# Altium PCB MK2.PcbDoc (part 5 of 7)
Units mil, origin at the board's own origin, x right, y up, seen from the top; angles counter-clockwise.
Board outline 3950 x 3965 mil, 2 copper layers (Top Layer, Bottom Layer); 19 components, 37 nets, 113 pads, 8 vias.
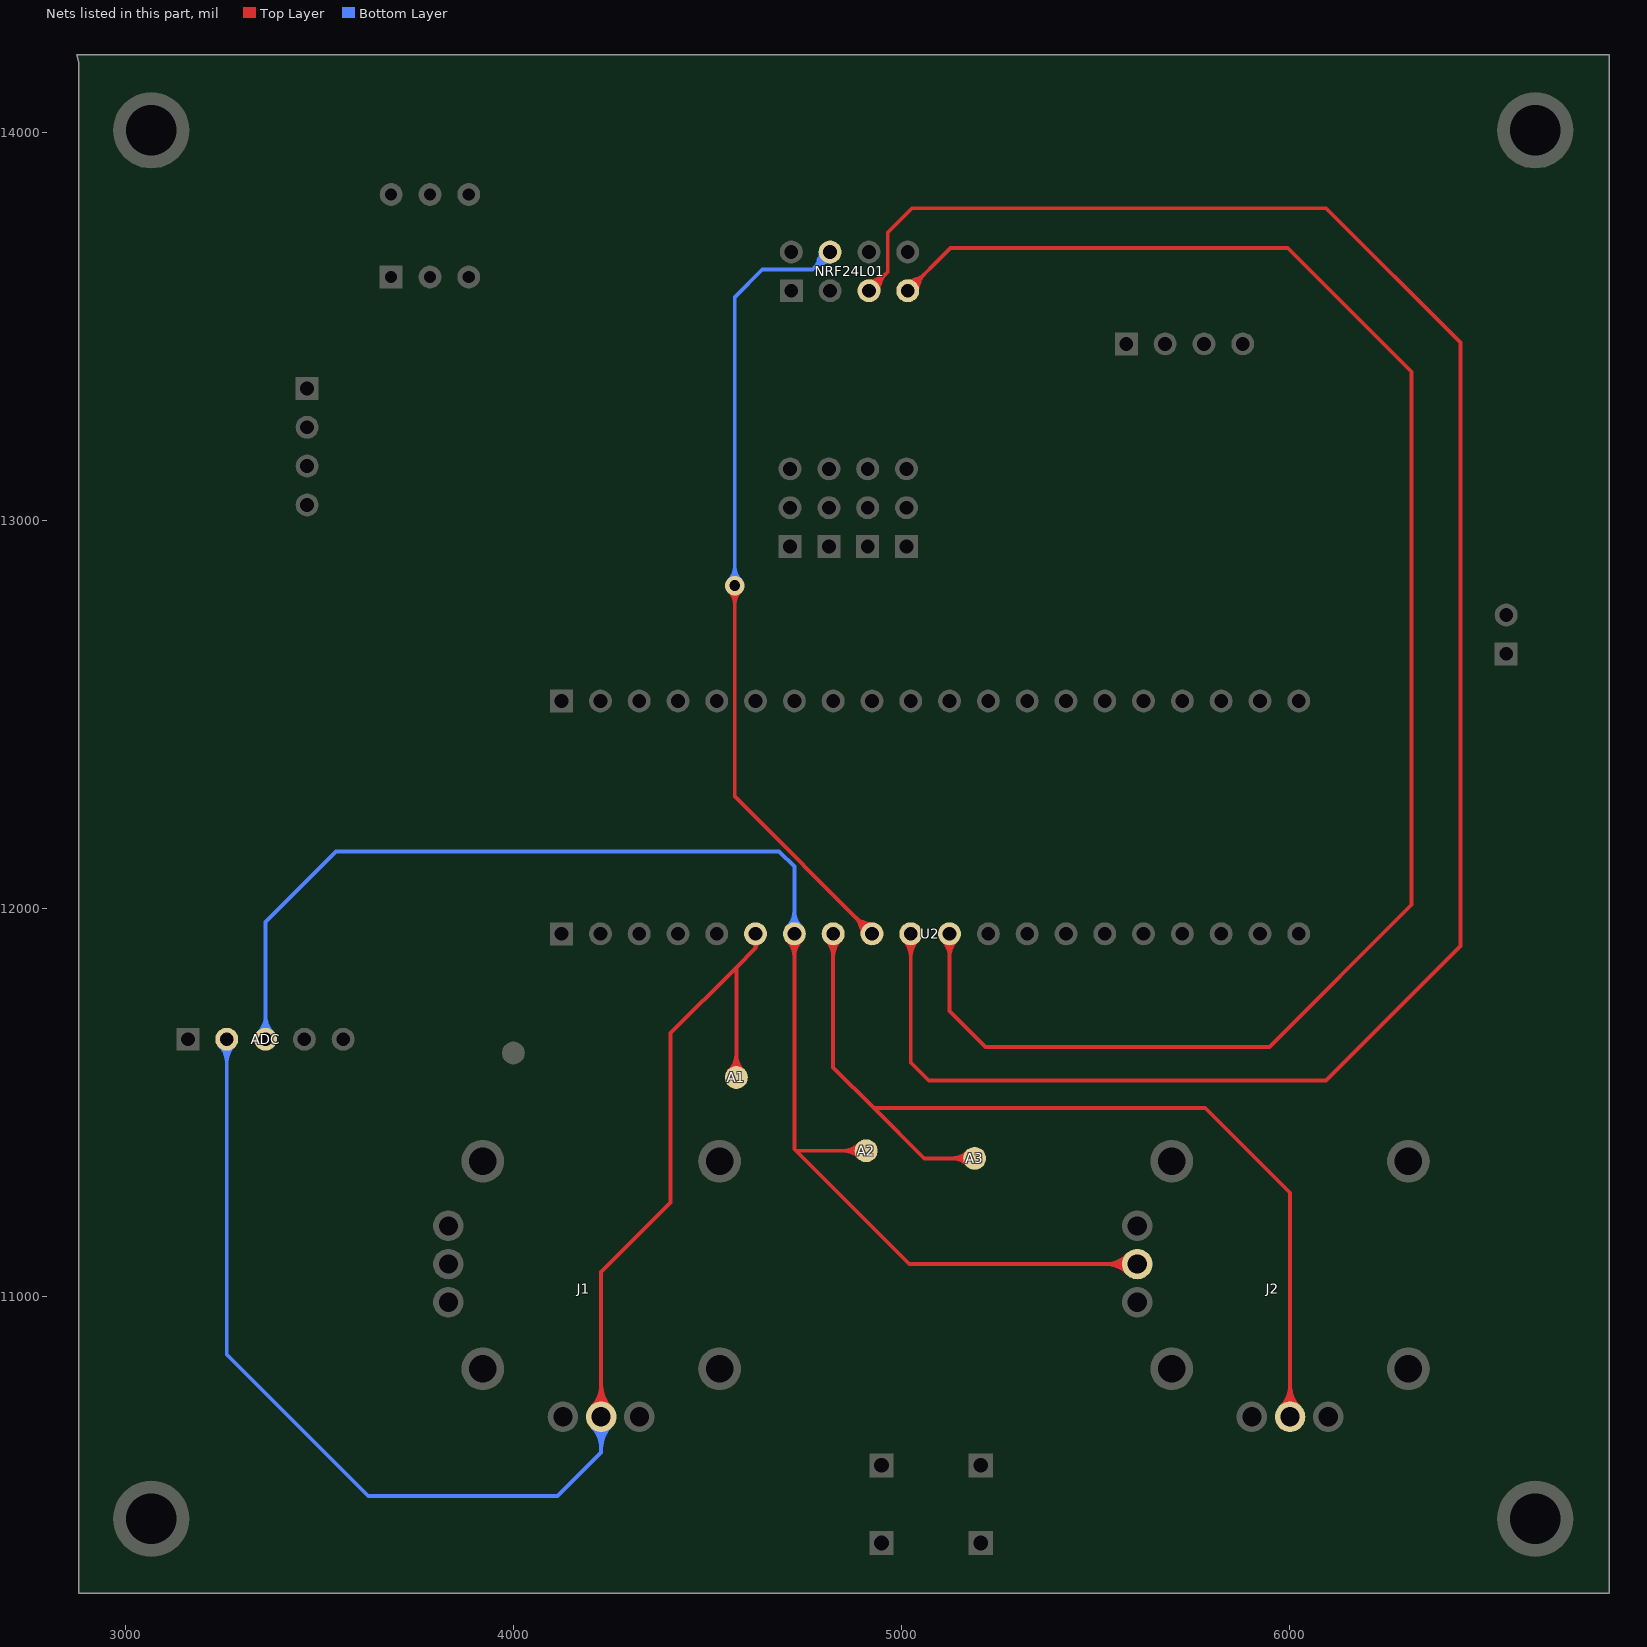
[diagram p5: the nets of this part, all layers, seen from the top]

## Via types
v1: diameter 50, hole 28, Top Layer to Bottom Layer, 8 vias

## Nets (pads, with @x,y where several pads share a name; then routed paths per layer and width w, separated by ;. In a path a pad name is that pad's centre, name@x,y a point inside that pad or via, vN(x,y) a via of type N, cw(c..) or ccw(c..) an arc to the next point about the centre after c; other vN are vias at no path point) (continued)
PA1: A1.1 ADC.2 J1.2 U2.6 | length 8430.2
  Top Layer w10: J1.2@4226.38,10689.65 4226.38,11062.36 4405.55,11241.54 4405.55,11678.54 4574.84,11847.83 ; A1.1@4574.84,11564.37 4574.84,11847.83 ; U2.6@4624.45,11934.45 4624.45,11897.44 ; J1.2@4202.07,10713.95 ccw(c4143.4,10772.62) 4226.38,10772.62 ; J1.2@4202.07,10713.95 ccw(c4143.4,10772.62) 4226.38,10772.62 ; J1.2@4202.07,10713.95 ccw(c4143.4,10772.62) 4226.38,10772.62 ; J1.2@4202.07,10713.95 ccw(c4143.4,10772.62) 4226.38,10772.62 ; J1.2@4202.07,10713.95 ccw(c4143.4,10772.62) 4226.38,10772.62 ; J1.2@4202.07,10713.95 ccw(c4143.4,10772.62) 4226.38,10772.62 ; J1.2@4209.15,10706.88 ccw(c4167.54,10748.48) 4226.38,10748.48 ; J1.2@4209.15,10706.88 ccw(c4167.54,10748.48) 4226.38,10748.48 ; J1.2@4209.15,10706.88 ccw(c4167.54,10748.48) 4226.38,10748.48 ; J1.2@4209.15,10706.88 ccw(c4167.54,10748.48) 4226.38,10748.48 ; J1.2@4209.15,10706.88 ccw(c4167.54,10748.48) 4226.38,10748.48 ; J1.2@4209.15,10706.88 ccw(c4167.54,10748.48) 4226.38,10748.48 ; 4226.38,10748.48 ccw(c4285.21,10748.48) J1.2@4243.61,10706.88 ; 4226.38,10748.48 ccw(c4285.21,10748.48) J1.2@4243.61,10706.88 ; 4226.38,10748.48 ccw(c4285.21,10748.48) J1.2@4243.61,10706.88 ; 4226.38,10748.48 ccw(c4285.21,10748.48) J1.2@4243.61,10706.88 ; 4226.38,10748.48 ccw(c4285.21,10748.48) J1.2@4243.61,10706.88 ; 4226.38,10748.48 ccw(c4285.21,10748.48) J1.2@4243.61,10706.88 ; 4226.38,10772.62 ccw(c4309.35,10772.62) J1.2@4250.68,10713.95 ; 4226.38,10772.62 ccw(c4309.35,10772.62) J1.2@4250.68,10713.95 ; 4226.38,10772.62 ccw(c4309.35,10772.62) J1.2@4250.68,10713.95 ; 4226.38,10772.62 ccw(c4309.35,10772.62) J1.2@4250.68,10713.95 ; 4226.38,10772.62 ccw(c4309.35,10772.62) J1.2@4250.68,10713.95 ; 4226.38,10772.62 ccw(c4309.35,10772.62) J1.2@4250.68,10713.95 ; A1.1@4557.5,11581.71 ccw(c4515.63,11623.58) 4574.84,11623.58 ; A1.1@4557.5,11581.71 ccw(c4515.63,11623.58) 4574.84,11623.58 ; A1.1@4557.5,11581.71 ccw(c4515.63,11623.58) 4574.84,11623.58 ; A1.1@4557.5,11581.71 ccw(c4515.63,11623.58) 4574.84,11623.58 ; A1.1@4557.5,11581.71 ccw(c4515.63,11623.58) 4574.84,11623.58 ; A1.1@4557.5,11581.71 ccw(c4515.63,11623.58) 4574.84,11623.58 ; A1.1@4564.57,11574.64 ccw(c4539.77,11599.44) 4574.84,11599.44 ; A1.1@4564.57,11574.64 ccw(c4539.77,11599.44) 4574.84,11599.44 ; A1.1@4564.57,11574.64 ccw(c4539.77,11599.44) 4574.84,11599.44 ; A1.1@4564.57,11574.64 ccw(c4539.77,11599.44) 4574.84,11599.44 ; A1.1@4564.57,11574.64 ccw(c4539.77,11599.44) 4574.84,11599.44 ; A1.1@4564.57,11574.64 ccw(c4539.77,11599.44) 4574.84,11599.44 ; 4574.84,11599.44 ccw(c4609.91,11599.44) A1.1@4585.11,11574.64 ; 4574.84,11599.44 ccw(c4609.91,11599.44) A1.1@4585.11,11574.64 ; 4574.84,11599.44 ccw(c4609.91,11599.44) A1.1@4585.11,11574.64 ; 4574.84,11599.44 ccw(c4609.91,11599.44) A1.1@4585.11,11574.64 ; 4574.84,11599.44 ccw(c4609.91,11599.44) A1.1@4585.11,11574.64 ; 4574.84,11599.44 ccw(c4609.91,11599.44) A1.1@4585.11,11574.64 ; 4574.84,11623.58 ccw(c4634.06,11623.58) A1.1@4592.19,11581.71 ; 4574.84,11623.58 ccw(c4634.06,11623.58) A1.1@4592.19,11581.71 ; 4574.84,11623.58 ccw(c4634.06,11623.58) A1.1@4592.19,11581.71 ; 4574.84,11623.58 ccw(c4634.06,11623.58) A1.1@4592.19,11581.71 ; 4574.84,11623.58 ccw(c4634.06,11623.58) A1.1@4592.19,11581.71 ; 4574.84,11623.58 ccw(c4634.06,11623.58) A1.1@4592.19,11581.71 ; 4574.84,11847.83 4624.45,11897.44 ; U2.6@4614.89,11911.86 cw(c4608.8,11897.44) 4624.45,11897.44 ; U2.6@4614.89,11911.86 cw(c4608.8,11897.44) 4624.45,11897.44 ; U2.6@4614.89,11911.86 cw(c4608.8,11897.44) 4624.45,11897.44 ; U2.6@4614.89,11911.86 cw(c4608.8,11897.44) 4624.45,11897.44 ; U2.6@4614.89,11911.86 cw(c4608.8,11897.44) 4624.45,11897.44 ; U2.6@4614.89,11911.86 cw(c4608.8,11897.44) 4624.45,11897.44 ; 4624.45,11897.44 cw(c4640.1,11897.44) U2.6@4634,11911.86 ; 4624.45,11897.44 cw(c4640.1,11897.44) U2.6@4634,11911.86 ; 4624.45,11897.44 cw(c4640.1,11897.44) U2.6@4634,11911.86 ; 4624.45,11897.44 cw(c4640.1,11897.44) U2.6@4634,11911.86 ; 4624.45,11897.44 cw(c4640.1,11897.44) U2.6@4634,11911.86 ; 4624.45,11897.44 cw(c4640.1,11897.44) U2.6@4634,11911.86
  Bottom Layer w10: ADC.2@3261.46,11662.8 3261.46,10850.2 3626.02,10485.63 4114.21,10485.63 4226.38,10597.8 J1.2@4226.38,10689.65 ; ADC.2@3244.11,11645.45 cw(c3202.24,11603.58) 3261.46,11603.58 ; ADC.2@3244.11,11645.45 cw(c3202.24,11603.58) 3261.46,11603.58 ; ADC.2@3244.11,11645.45 cw(c3202.24,11603.58) 3261.46,11603.58 ; ADC.2@3244.11,11645.45 cw(c3202.24,11603.58) 3261.46,11603.58 ; ADC.2@3244.11,11645.45 cw(c3202.24,11603.58) 3261.46,11603.58 ; ADC.2@3244.11,11645.45 cw(c3202.24,11603.58) 3261.46,11603.58 ; ADC.2@3251.18,11652.52 cw(c3226.38,11627.72) 3261.46,11627.72 ; ADC.2@3251.18,11652.52 cw(c3226.38,11627.72) 3261.46,11627.72 ; ADC.2@3251.18,11652.52 cw(c3226.38,11627.72) 3261.46,11627.72 ; ADC.2@3251.18,11652.52 cw(c3226.38,11627.72) 3261.46,11627.72 ; ADC.2@3251.18,11652.52 cw(c3226.38,11627.72) 3261.46,11627.72 ; ADC.2@3251.18,11652.52 cw(c3226.38,11627.72) 3261.46,11627.72 ; 3261.46,11603.58 cw(c3320.67,11603.58) ADC.2@3278.8,11645.45 ; 3261.46,11603.58 cw(c3320.67,11603.58) ADC.2@3278.8,11645.45 ; 3261.46,11603.58 cw(c3320.67,11603.58) ADC.2@3278.8,11645.45 ; 3261.46,11603.58 cw(c3320.67,11603.58) ADC.2@3278.8,11645.45 ; 3261.46,11603.58 cw(c3320.67,11603.58) ADC.2@3278.8,11645.45 ; 3261.46,11603.58 cw(c3320.67,11603.58) ADC.2@3278.8,11645.45 ; 3261.46,11627.72 cw(c3296.53,11627.72) ADC.2@3271.73,11652.52 ; 3261.46,11627.72 cw(c3296.53,11627.72) ADC.2@3271.73,11652.52 ; 3261.46,11627.72 cw(c3296.53,11627.72) ADC.2@3271.73,11652.52 ; 3261.46,11627.72 cw(c3296.53,11627.72) ADC.2@3271.73,11652.52 ; 3261.46,11627.72 cw(c3296.53,11627.72) ADC.2@3271.73,11652.52 ; 3261.46,11627.72 cw(c3296.53,11627.72) ADC.2@3271.73,11652.52 ; J1.2@4202.07,10665.34 cw(c4143.4,10606.67) 4226.38,10606.67 ; J1.2@4202.07,10665.34 cw(c4143.4,10606.67) 4226.38,10606.67 ; J1.2@4202.07,10665.34 cw(c4143.4,10606.67) 4226.38,10606.67 ; J1.2@4202.07,10665.34 cw(c4143.4,10606.67) 4226.38,10606.67 ; J1.2@4202.07,10665.34 cw(c4143.4,10606.67) 4226.38,10606.67 ; J1.2@4202.07,10665.34 cw(c4143.4,10606.67) 4226.38,10606.67 ; J1.2@4209.15,10672.41 cw(c4167.54,10630.81) 4226.38,10630.81 ; J1.2@4209.15,10672.41 cw(c4167.54,10630.81) 4226.38,10630.81 ; J1.2@4209.15,10672.41 cw(c4167.54,10630.81) 4226.38,10630.81 ; J1.2@4209.15,10672.41 cw(c4167.54,10630.81) 4226.38,10630.81 ; J1.2@4209.15,10672.41 cw(c4167.54,10630.81) 4226.38,10630.81 ; J1.2@4209.15,10672.41 cw(c4167.54,10630.81) 4226.38,10630.81 ; 4226.38,10606.67 cw(c4309.35,10606.67) J1.2@4250.68,10665.34 ; 4226.38,10606.67 cw(c4309.35,10606.67) J1.2@4250.68,10665.34 ; 4226.38,10606.67 cw(c4309.35,10606.67) J1.2@4250.68,10665.34 ; 4226.38,10606.67 cw(c4309.35,10606.67) J1.2@4250.68,10665.34 ; 4226.38,10606.67 cw(c4309.35,10606.67) J1.2@4250.68,10665.34 ; 4226.38,10606.67 cw(c4309.35,10606.67) J1.2@4250.68,10665.34 ; 4226.38,10630.81 cw(c4285.21,10630.81) J1.2@4243.61,10672.41 ; 4226.38,10630.81 cw(c4285.21,10630.81) J1.2@4243.61,10672.41 ; 4226.38,10630.81 cw(c4285.21,10630.81) J1.2@4243.61,10672.41 ; 4226.38,10630.81 cw(c4285.21,10630.81) J1.2@4243.61,10672.41 ; 4226.38,10630.81 cw(c4285.21,10630.81) J1.2@4243.61,10672.41 ; 4226.38,10630.81 cw(c4285.21,10630.81) J1.2@4243.61,10672.41
PA2: A2.1 ADC.3 J2.5 U2.7 | length 8564
  Top Layer w10: U2.7@4724.45,11934.45 4724.45,11379.33 4728.39,11375.39 ; A2.1@4909.49,11375.39 4728.39,11375.39 ; J2.5@5608.27,11083.35 5020.43,11083.35 4728.39,11375.39 ; U2.7@4707.11,11917.11 cw(c4665.23,11875.23) 4724.45,11875.23 ; U2.7@4707.11,11917.11 cw(c4665.23,11875.23) 4724.45,11875.23 ; U2.7@4707.11,11917.11 cw(c4665.23,11875.23) 4724.45,11875.23 ; U2.7@4707.11,11917.11 cw(c4665.23,11875.23) 4724.45,11875.23 ; U2.7@4707.11,11917.11 cw(c4665.23,11875.23) 4724.45,11875.23 ; U2.7@4707.11,11917.11 cw(c4665.23,11875.23) 4724.45,11875.23 ; U2.7@4714.18,11924.18 cw(c4689.38,11899.38) 4724.45,11899.38 ; U2.7@4714.18,11924.18 cw(c4689.38,11899.38) 4724.45,11899.38 ; U2.7@4714.18,11924.18 cw(c4689.38,11899.38) 4724.45,11899.38 ; U2.7@4714.18,11924.18 cw(c4689.38,11899.38) 4724.45,11899.38 ; U2.7@4714.18,11924.18 cw(c4689.38,11899.38) 4724.45,11899.38 ; U2.7@4714.18,11924.18 cw(c4689.38,11899.38) 4724.45,11899.38 ; 4724.45,11875.23 cw(c4783.66,11875.23) U2.7@4741.79,11917.11 ; 4724.45,11875.23 cw(c4783.66,11875.23) U2.7@4741.79,11917.11 ; 4724.45,11875.23 cw(c4783.66,11875.23) U2.7@4741.79,11917.11 ; 4724.45,11875.23 cw(c4783.66,11875.23) U2.7@4741.79,11917.11 ; 4724.45,11875.23 cw(c4783.66,11875.23) U2.7@4741.79,11917.11 ; 4724.45,11875.23 cw(c4783.66,11875.23) U2.7@4741.79,11917.11 ; 4724.45,11899.38 cw(c4759.52,11899.38) U2.7@4734.72,11924.18 ; 4724.45,11899.38 cw(c4759.52,11899.38) U2.7@4734.72,11924.18 ; 4724.45,11899.38 cw(c4759.52,11899.38) U2.7@4734.72,11924.18 ; 4724.45,11899.38 cw(c4759.52,11899.38) U2.7@4734.72,11924.18 ; 4724.45,11899.38 cw(c4759.52,11899.38) U2.7@4734.72,11924.18 ; 4724.45,11899.38 cw(c4759.52,11899.38) U2.7@4734.72,11924.18 ; 4850.27,11375.39 cw(c4850.27,11316.18) A2.1@4892.14,11358.05 ; 4850.27,11375.39 ccw(c4850.27,11434.61) A2.1@4892.14,11392.74 ; 4850.27,11375.39 ccw(c4850.27,11434.61) A2.1@4892.14,11392.74 ; 4850.27,11375.39 cw(c4850.27,11316.18) A2.1@4892.14,11358.05 ; 4850.27,11375.39 ccw(c4850.27,11434.61) A2.1@4892.14,11392.74 ; 4850.27,11375.39 cw(c4850.27,11316.18) A2.1@4892.14,11358.05 ; 4850.27,11375.39 ccw(c4850.27,11434.61) A2.1@4892.14,11392.74 ; 4850.27,11375.39 cw(c4850.27,11316.18) A2.1@4892.14,11358.05 ; 4850.27,11375.39 ccw(c4850.27,11434.61) A2.1@4892.14,11392.74 ; 4850.27,11375.39 cw(c4850.27,11316.18) A2.1@4892.14,11358.05 ; 4850.27,11375.39 ccw(c4850.27,11434.61) A2.1@4892.14,11392.74 ; 4850.27,11375.39 cw(c4850.27,11316.18) A2.1@4892.14,11358.05 ; 4874.42,11375.39 cw(c4874.42,11340.32) A2.1@4899.22,11365.12 ; 4874.42,11375.39 ccw(c4874.42,11410.47) A2.1@4899.22,11385.67 ; 4874.42,11375.39 ccw(c4874.42,11410.47) A2.1@4899.22,11385.67 ; 4874.42,11375.39 cw(c4874.42,11340.32) A2.1@4899.22,11365.12 ; 4874.42,11375.39 ccw(c4874.42,11410.47) A2.1@4899.22,11385.67 ; 4874.42,11375.39 cw(c4874.42,11340.32) A2.1@4899.22,11365.12 ; 4874.42,11375.39 ccw(c4874.42,11410.47) A2.1@4899.22,11385.67 ; 4874.42,11375.39 cw(c4874.42,11340.32) A2.1@4899.22,11365.12 ; 4874.42,11375.39 ccw(c4874.42,11410.47) A2.1@4899.22,11385.67 ; 4874.42,11375.39 cw(c4874.42,11340.32) A2.1@4899.22,11365.12 ; 4874.42,11375.39 ccw(c4874.42,11410.47) A2.1@4899.22,11385.67 ; 4874.42,11375.39 cw(c4874.42,11340.32) A2.1@4899.22,11365.12 ; 5525.29,11083.35 cw(c5525.29,11000.37) J2.5@5583.96,11059.04 ; 5525.29,11083.35 ccw(c5525.29,11166.32) J2.5@5583.96,11107.65 ; 5525.29,11083.35 ccw(c5525.29,11166.32) J2.5@5583.96,11107.65 ; 5525.29,11083.35 cw(c5525.29,11000.37) J2.5@5583.96,11059.04 ; 5525.29,11083.35 ccw(c5525.29,11166.32) J2.5@5583.96,11107.65 ; 5525.29,11083.35 cw(c5525.29,11000.37) J2.5@5583.96,11059.04 ; 5525.29,11083.35 ccw(c5525.29,11166.32) J2.5@5583.96,11107.65 ; 5525.29,11083.35 cw(c5525.29,11000.37) J2.5@5583.96,11059.04 ; 5525.29,11083.35 ccw(c5525.29,11166.32) J2.5@5583.96,11107.65 ; 5525.29,11083.35 cw(c5525.29,11000.37) J2.5@5583.96,11059.04 ; 5525.29,11083.35 ccw(c5525.29,11166.32) J2.5@5583.96,11107.65 ; 5525.29,11083.35 cw(c5525.29,11000.37) J2.5@5583.96,11059.04 ; 5549.43,11083.35 cw(c5549.43,11024.51) J2.5@5591.04,11066.11 ; 5549.43,11083.35 ccw(c5549.43,11142.18) J2.5@5591.04,11100.58 ; 5549.43,11083.35 ccw(c5549.43,11142.18) J2.5@5591.04,11100.58 ; 5549.43,11083.35 cw(c5549.43,11024.51) J2.5@5591.04,11066.11 ; 5549.43,11083.35 ccw(c5549.43,11142.18) J2.5@5591.04,11100.58 ; 5549.43,11083.35 cw(c5549.43,11024.51) J2.5@5591.04,11066.11 ; 5549.43,11083.35 ccw(c5549.43,11142.18) J2.5@5591.04,11100.58 ; 5549.43,11083.35 cw(c5549.43,11024.51) J2.5@5591.04,11066.11 ; 5549.43,11083.35 ccw(c5549.43,11142.18) J2.5@5591.04,11100.58 ; 5549.43,11083.35 cw(c5549.43,11024.51) J2.5@5591.04,11066.11 ; 5549.43,11083.35 ccw(c5549.43,11142.18) J2.5@5591.04,11100.58 ; 5549.43,11083.35 cw(c5549.43,11024.51) J2.5@5591.04,11066.11
  Bottom Layer w10: ADC.3@3361.46,11662.8 3361.46,11965.16 3543.35,12147.05 4685.08,12147.05 4724.45,12107.68 U2.7@4724.45,11934.45 ; ADC.3@3344.11,11680.14 ccw(c3302.24,11722.01) 3361.46,11722.01 ; ADC.3@3344.11,11680.14 ccw(c3302.24,11722.01) 3361.46,11722.01 ; ADC.3@3344.11,11680.14 ccw(c3302.24,11722.01) 3361.46,11722.01 ; ADC.3@3344.11,11680.14 ccw(c3302.24,11722.01) 3361.46,11722.01 ; ADC.3@3344.11,11680.14 ccw(c3302.24,11722.01) 3361.46,11722.01 ; ADC.3@3344.11,11680.14 ccw(c3302.24,11722.01) 3361.46,11722.01 ; ADC.3@3351.18,11673.07 ccw(c3326.38,11697.87) 3361.46,11697.87 ; ADC.3@3351.18,11673.07 ccw(c3326.38,11697.87) 3361.46,11697.87 ; ADC.3@3351.18,11673.07 ccw(c3326.38,11697.87) 3361.46,11697.87 ; ADC.3@3351.18,11673.07 ccw(c3326.38,11697.87) 3361.46,11697.87 ; ADC.3@3351.18,11673.07 ccw(c3326.38,11697.87) 3361.46,11697.87 ; ADC.3@3351.18,11673.07 ccw(c3326.38,11697.87) 3361.46,11697.87 ; 3361.46,11697.87 ccw(c3396.53,11697.87) ADC.3@3371.73,11673.07 ; 3361.46,11697.87 ccw(c3396.53,11697.87) ADC.3@3371.73,11673.07 ; 3361.46,11697.87 ccw(c3396.53,11697.87) ADC.3@3371.73,11673.07 ; 3361.46,11697.87 ccw(c3396.53,11697.87) ADC.3@3371.73,11673.07 ; 3361.46,11697.87 ccw(c3396.53,11697.87) ADC.3@3371.73,11673.07 ; 3361.46,11697.87 ccw(c3396.53,11697.87) ADC.3@3371.73,11673.07 ; 3361.46,11722.01 ccw(c3420.67,11722.01) ADC.3@3378.8,11680.14 ; 3361.46,11722.01 ccw(c3420.67,11722.01) ADC.3@3378.8,11680.14 ; 3361.46,11722.01 ccw(c3420.67,11722.01) ADC.3@3378.8,11680.14 ; 3361.46,11722.01 ccw(c3420.67,11722.01) ADC.3@3378.8,11680.14 ; 3361.46,11722.01 ccw(c3420.67,11722.01) ADC.3@3378.8,11680.14 ; 3361.46,11722.01 ccw(c3420.67,11722.01) ADC.3@3378.8,11680.14 ; U2.7@4707.11,11951.79 ccw(c4665.23,11993.66) 4724.45,11993.66 ; U2.7@4707.11,11951.79 ccw(c4665.23,11993.66) 4724.45,11993.66 ; U2.7@4707.11,11951.79 ccw(c4665.23,11993.66) 4724.45,11993.66 ; U2.7@4707.11,11951.79 ccw(c4665.23,11993.66) 4724.45,11993.66 ; U2.7@4707.11,11951.79 ccw(c4665.23,11993.66) 4724.45,11993.66 ; U2.7@4707.11,11951.79 ccw(c4665.23,11993.66) 4724.45,11993.66 ; U2.7@4714.18,11944.72 ccw(c4689.38,11969.52) 4724.45,11969.52 ; U2.7@4714.18,11944.72 ccw(c4689.38,11969.52) 4724.45,11969.52 ; U2.7@4714.18,11944.72 ccw(c4689.38,11969.52) 4724.45,11969.52 ; U2.7@4714.18,11944.72 ccw(c4689.38,11969.52) 4724.45,11969.52 ; U2.7@4714.18,11944.72 ccw(c4689.38,11969.52) 4724.45,11969.52 ; U2.7@4714.18,11944.72 ccw(c4689.38,11969.52) 4724.45,11969.52 ; 4724.45,11969.52 ccw(c4759.52,11969.52) U2.7@4734.72,11944.72 ; 4724.45,11969.52 ccw(c4759.52,11969.52) U2.7@4734.72,11944.72 ; 4724.45,11969.52 ccw(c4759.52,11969.52) U2.7@4734.72,11944.72 ; 4724.45,11969.52 ccw(c4759.52,11969.52) U2.7@4734.72,11944.72 ; 4724.45,11969.52 ccw(c4759.52,11969.52) U2.7@4734.72,11944.72 ; 4724.45,11969.52 ccw(c4759.52,11969.52) U2.7@4734.72,11944.72 ; 4724.45,11993.66 ccw(c4783.66,11993.66) U2.7@4741.79,11951.79 ; 4724.45,11993.66 ccw(c4783.66,11993.66) U2.7@4741.79,11951.79 ; 4724.45,11993.66 ccw(c4783.66,11993.66) U2.7@4741.79,11951.79 ; 4724.45,11993.66 ccw(c4783.66,11993.66) U2.7@4741.79,11951.79 ; 4724.45,11993.66 ccw(c4783.66,11993.66) U2.7@4741.79,11951.79 ; 4724.45,11993.66 ccw(c4783.66,11993.66) U2.7@4741.79,11951.79
PA3: A3.1 J2.2 U2.8 | length 5660.5
  Top Layer w10: U2.8@4824.45,11934.45 4824.45,11590.35 4929.17,11485.63 ; A3.1@5189.02,11355.71 5059.09,11355.71 4929.17,11485.63 ; J2.2@6001.97,10689.65 6001.97,11267.17 5783.5,11485.63 4929.17,11485.63 ; U2.8@4807.11,11917.11 cw(c4765.23,11875.23) 4824.45,11875.23 ; U2.8@4807.11,11917.11 cw(c4765.23,11875.23) 4824.45,11875.23 ; U2.8@4807.11,11917.11 cw(c4765.23,11875.23) 4824.45,11875.23 ; U2.8@4807.11,11917.11 cw(c4765.23,11875.23) 4824.45,11875.23 ; U2.8@4807.11,11917.11 cw(c4765.23,11875.23) 4824.45,11875.23 ; U2.8@4807.11,11917.11 cw(c4765.23,11875.23) 4824.45,11875.23 ; U2.8@4814.18,11924.18 cw(c4789.38,11899.38) 4824.45,11899.38 ; U2.8@4814.18,11924.18 cw(c4789.38,11899.38) 4824.45,11899.38 ; U2.8@4814.18,11924.18 cw(c4789.38,11899.38) 4824.45,11899.38 ; U2.8@4814.18,11924.18 cw(c4789.38,11899.38) 4824.45,11899.38 ; U2.8@4814.18,11924.18 cw(c4789.38,11899.38) 4824.45,11899.38 ; U2.8@4814.18,11924.18 cw(c4789.38,11899.38) 4824.45,11899.38 ; 4824.45,11875.23 cw(c4883.66,11875.23) U2.8@4841.79,11917.11 ; 4824.45,11875.23 cw(c4883.66,11875.23) U2.8@4841.79,11917.11 ; 4824.45,11875.23 cw(c4883.66,11875.23) U2.8@4841.79,11917.11 ; 4824.45,11875.23 cw(c4883.66,11875.23) U2.8@4841.79,11917.11 ; 4824.45,11875.23 cw(c4883.66,11875.23) U2.8@4841.79,11917.11 ; 4824.45,11875.23 cw(c4883.66,11875.23) U2.8@4841.79,11917.11 ; 4824.45,11899.38 cw(c4859.52,11899.38) U2.8@4834.72,11924.18 ; 4824.45,11899.38 cw(c4859.52,11899.38) U2.8@4834.72,11924.18 ; 4824.45,11899.38 cw(c4859.52,11899.38) U2.8@4834.72,11924.18 ; 4824.45,11899.38 cw(c4859.52,11899.38) U2.8@4834.72,11924.18 ; 4824.45,11899.38 cw(c4859.52,11899.38) U2.8@4834.72,11924.18 ; 4824.45,11899.38 cw(c4859.52,11899.38) U2.8@4834.72,11924.18 ; 5129.8,11355.71 cw(c5129.8,11296.49) A3.1@5171.67,11338.37 ; 5129.8,11355.71 ccw(c5129.8,11414.92) A3.1@5171.67,11373.05 ; 5129.8,11355.71 ccw(c5129.8,11414.92) A3.1@5171.67,11373.05 ; 5129.8,11355.71 cw(c5129.8,11296.49) A3.1@5171.67,11338.37 ; 5129.8,11355.71 ccw(c5129.8,11414.92) A3.1@5171.67,11373.05 ; 5129.8,11355.71 cw(c5129.8,11296.49) A3.1@5171.67,11338.37 ; 5129.8,11355.71 ccw(c5129.8,11414.92) A3.1@5171.67,11373.05 ; 5129.8,11355.71 cw(c5129.8,11296.49) A3.1@5171.67,11338.37 ; 5129.8,11355.71 ccw(c5129.8,11414.92) A3.1@5171.67,11373.05 ; 5129.8,11355.71 cw(c5129.8,11296.49) A3.1@5171.67,11338.37 ; 5129.8,11355.71 ccw(c5129.8,11414.92) A3.1@5171.67,11373.05 ; 5129.8,11355.71 cw(c5129.8,11296.49) A3.1@5171.67,11338.37 ; 5153.94,11355.71 cw(c5153.94,11320.64) A3.1@5178.74,11345.44 ; 5153.94,11355.71 ccw(c5153.94,11390.78) A3.1@5178.74,11365.98 ; 5153.94,11355.71 ccw(c5153.94,11390.78) A3.1@5178.74,11365.98 ; 5153.94,11355.71 cw(c5153.94,11320.64) A3.1@5178.74,11345.44 ; 5153.94,11355.71 ccw(c5153.94,11390.78) A3.1@5178.74,11365.98 ; 5153.94,11355.71 cw(c5153.94,11320.64) A3.1@5178.74,11345.44 ; 5153.94,11355.71 ccw(c5153.94,11390.78) A3.1@5178.74,11365.98 ; 5153.94,11355.71 cw(c5153.94,11320.64) A3.1@5178.74,11345.44 ; 5153.94,11355.71 ccw(c5153.94,11390.78) A3.1@5178.74,11365.98 ; 5153.94,11355.71 cw(c5153.94,11320.64) A3.1@5178.74,11345.44 ; 5153.94,11355.71 ccw(c5153.94,11390.78) A3.1@5178.74,11365.98 ; 5153.94,11355.71 cw(c5153.94,11320.64) A3.1@5178.74,11345.44 ; J2.2@5977.67,10713.95 ccw(c5918.99,10772.62) 6001.97,10772.62 ; J2.2@5977.67,10713.95 ccw(c5918.99,10772.62) 6001.97,10772.62 ; J2.2@5977.67,10713.95 ccw(c5918.99,10772.62) 6001.97,10772.62 ; J2.2@5977.67,10713.95 ccw(c5918.99,10772.62) 6001.97,10772.62 ; J2.2@5977.67,10713.95 ccw(c5918.99,10772.62) 6001.97,10772.62 ; J2.2@5977.67,10713.95 ccw(c5918.99,10772.62) 6001.97,10772.62 ; J2.2@5984.74,10706.88 ccw(c5943.13,10748.48) 6001.97,10748.48 ; J2.2@5984.74,10706.88 ccw(c5943.13,10748.48) 6001.97,10748.48 ; J2.2@5984.74,10706.88 ccw(c5943.13,10748.48) 6001.97,10748.48 ; J2.2@5984.74,10706.88 ccw(c5943.13,10748.48) 6001.97,10748.48 ; J2.2@5984.74,10706.88 ccw(c5943.13,10748.48) 6001.97,10748.48 ; J2.2@5984.74,10706.88 ccw(c5943.13,10748.48) 6001.97,10748.48 ; 6001.97,10748.48 ccw(c6060.8,10748.48) J2.2@6019.2,10706.88 ; 6001.97,10748.48 ccw(c6060.8,10748.48) J2.2@6019.2,10706.88 ; 6001.97,10748.48 ccw(c6060.8,10748.48) J2.2@6019.2,10706.88 ; 6001.97,10748.48 ccw(c6060.8,10748.48) J2.2@6019.2,10706.88 ; 6001.97,10748.48 ccw(c6060.8,10748.48) J2.2@6019.2,10706.88 ; 6001.97,10748.48 ccw(c6060.8,10748.48) J2.2@6019.2,10706.88 ; 6001.97,10772.62 ccw(c6084.95,10772.62) J2.2@6026.27,10713.95 ; 6001.97,10772.62 ccw(c6084.95,10772.62) J2.2@6026.27,10713.95 ; 6001.97,10772.62 ccw(c6084.95,10772.62) J2.2@6026.27,10713.95 ; 6001.97,10772.62 ccw(c6084.95,10772.62) J2.2@6026.27,10713.95 ; 6001.97,10772.62 ccw(c6084.95,10772.62) J2.2@6026.27,10713.95 ; 6001.97,10772.62 ccw(c6084.95,10772.62) J2.2@6026.27,10713.95
PA4: NRF24L01.4 U2.9 | length 7322.3
  Top Layer w10: v1(4570.91,12832.09) 4570.91,12287.99 U2.9@4924.45,11934.45 ; v1@4556.76,12817.94 cw(c4522.62,12783.8) 4570.91,12783.8 ; v1@4556.76,12817.94 cw(c4522.62,12783.8) 4570.91,12783.8 ; v1@4556.76,12817.94 cw(c4522.62,12783.8) 4570.91,12783.8 ; v1@4556.76,12817.94 cw(c4522.62,12783.8) 4570.91,12783.8 ; v1@4556.76,12817.94 cw(c4522.62,12783.8) 4570.91,12783.8 ; v1@4556.76,12817.94 cw(c4522.62,12783.8) 4570.91,12783.8 ; 4570.91,12783.8 cw(c4619.19,12783.8) v1@4585.05,12817.94 ; 4570.91,12783.8 cw(c4619.19,12783.8) v1@4585.05,12817.94 ; 4570.91,12783.8 cw(c4619.19,12783.8) v1@4585.05,12817.94 ; 4570.91,12783.8 cw(c4619.19,12783.8) v1@4585.05,12817.94 ; 4570.91,12783.8 cw(c4619.19,12783.8) v1@4585.05,12817.94 ; 4570.91,12783.8 cw(c4619.19,12783.8) v1@4585.05,12817.94 ; 4882.58,11976.32 cw(c4840.71,11934.45) U2.9@4899.92,11934.45 ; 4882.58,11976.32 ccw(c4924.45,12018.19) U2.9@4924.45,11958.98 ; 4882.58,11976.32 ccw(c4924.45,12018.19) U2.9@4924.45,11958.98 ; 4882.58,11976.32 cw(c4840.71,11934.45) U2.9@4899.92,11934.45 ; 4882.58,11976.32 ccw(c4924.45,12018.19) U2.9@4924.45,11958.98 ; 4882.58,11976.32 cw(c4840.71,11934.45) U2.9@4899.92,11934.45 ; 4882.58,11976.32 ccw(c4924.45,12018.19) U2.9@4924.45,11958.98 ; 4882.58,11976.32 cw(c4840.71,11934.45) U2.9@4899.92,11934.45 ; 4882.58,11976.32 ccw(c4924.45,12018.19) U2.9@4924.45,11958.98 ; 4882.58,11976.32 cw(c4840.71,11934.45) U2.9@4899.92,11934.45 ; 4882.58,11976.32 ccw(c4924.45,12018.19) U2.9@4924.45,11958.98 ; 4882.58,11976.32 cw(c4840.71,11934.45) U2.9@4899.92,11934.45 ; 4893.93,11956.8 ccw(c4931.06,11966.75) U2.9@4923.35,11929.09 ; 4893.93,11956.8 ccw(c4931.06,11966.75) U2.9@4923.35,11929.09 ; 4893.93,11956.8 ccw(c4931.06,11966.75) U2.9@4923.35,11929.09 ; 4893.93,11956.8 ccw(c4931.06,11966.75) U2.9@4923.35,11929.09 ; 4893.93,11956.8 ccw(c4931.06,11966.75) U2.9@4923.35,11929.09 ; 4893.93,11956.8 ccw(c4931.06,11966.75) U2.9@4923.35,11929.09 ; 4893.93,11956.8 ccw(c4931.06,11966.75) U2.9@4923.35,11929.09 ; 4893.93,11956.8 ccw(c4931.06,11966.75) U2.9@4923.35,11929.09 ; 4893.93,11956.8 ccw(c4931.06,11966.75) U2.9@4923.35,11929.09 ; 4893.93,11956.8 ccw(c4931.06,11966.75) U2.9@4923.35,11929.09 ; 4893.93,11956.8 ccw(c4931.06,11966.75) U2.9@4923.35,11929.09 ; 4893.93,11956.8 ccw(c4931.06,11966.75) U2.9@4923.35,11929.09 ; 4893.93,11956.8 ccw(c4931.06,11966.75) U2.9@4923.35,11929.09 ; 4893.93,11956.8 ccw(c4931.06,11966.75) U2.9@4923.35,11929.09 ; 4893.93,11956.8 ccw(c4931.06,11966.75) U2.9@4923.35,11929.09 ; 4899.65,11959.25 cw(c4874.85,11934.45) U2.9@4909.92,11934.45 ; 4899.65,11959.25 ccw(c4924.45,11984.05) U2.9@4924.45,11948.98 ; 4899.65,11959.25 ccw(c4924.45,11984.05) U2.9@4924.45,11948.98 ; 4899.65,11959.25 cw(c4874.85,11934.45) U2.9@4909.92,11934.45 ; 4899.65,11959.25 ccw(c4924.45,11984.05) U2.9@4924.45,11948.98 ; 4899.65,11959.25 cw(c4874.85,11934.45) U2.9@4909.92,11934.45 ; 4899.65,11959.25 ccw(c4924.45,11984.05) U2.9@4924.45,11948.98 ; 4899.65,11959.25 cw(c4874.85,11934.45) U2.9@4909.92,11934.45 ; 4899.65,11959.25 ccw(c4924.45,11984.05) U2.9@4924.45,11948.98 ; 4899.65,11959.25 cw(c4874.85,11934.45) U2.9@4909.92,11934.45 ; 4899.65,11959.25 ccw(c4924.45,11984.05) U2.9@4924.45,11948.98 ; 4899.65,11959.25 cw(c4874.85,11934.45) U2.9@4909.92,11934.45 ; 4902.1,11964.96 cw(c4892.15,11927.84) U2.9@4929.81,11935.55 ; 4902.1,11964.96 cw(c4892.15,11927.84) U2.9@4929.81,11935.55 ; 4902.1,11964.96 cw(c4892.15,11927.84) U2.9@4929.81,11935.55 ; 4902.1,11964.96 cw(c4892.15,11927.84) U2.9@4929.81,11935.55 ; 4902.1,11964.96 cw(c4892.15,11927.84) U2.9@4929.81,11935.55 ; 4902.1,11964.96 cw(c4892.15,11927.84) U2.9@4929.81,11935.55 ; 4902.1,11964.96 cw(c4892.15,11927.84) U2.9@4929.81,11935.55 ; 4902.1,11964.96 cw(c4892.15,11927.84) U2.9@4929.81,11935.55 ; 4902.1,11964.96 cw(c4892.15,11927.84) U2.9@4929.81,11935.55 ; 4902.1,11964.96 cw(c4892.15,11927.84) U2.9@4929.81,11935.55 ; 4902.1,11964.96 cw(c4892.15,11927.84) U2.9@4929.81,11935.55 ; 4902.1,11964.96 cw(c4892.15,11927.84) U2.9@4929.81,11935.55 ; 4902.1,11964.96 cw(c4892.15,11927.84) U2.9@4929.81,11935.55 ; 4902.1,11964.96 cw(c4892.15,11927.84) U2.9@4929.81,11935.55 ; 4902.1,11964.96 cw(c4892.15,11927.84) U2.9@4929.81,11935.55
  Bottom Layer w10: v1(4570.91,12832.09) 4570.91,13576.18 4641.77,13647.05 4771.69,13647.05 NRF24L01.4@4816.57,13691.93 ; v1@4556.76,12846.23 ccw(c4522.62,12880.37) 4570.91,12880.37 ; v1@4556.76,12846.23 ccw(c4522.62,12880.37) 4570.91,12880.37 ; v1@4556.76,12846.23 ccw(c4522.62,12880.37) 4570.91,12880.37 ; v1@4556.76,12846.23 ccw(c4522.62,12880.37) 4570.91,12880.37 ; v1@4556.76,12846.23 ccw(c4522.62,12880.37) 4570.91,12880.37 ; v1@4556.76,12846.23 ccw(c4522.62,12880.37) 4570.91,12880.37 ; 4570.91,12880.37 ccw(c4619.19,12880.37) v1@4585.05,12846.23 ; 4570.91,12880.37 ccw(c4619.19,12880.37) v1@4585.05,12846.23 ; 4570.91,12880.37 ccw(c4619.19,12880.37) v1@4585.05,12846.23 ; 4570.91,12880.37 ccw(c4619.19,12880.37) v1@4585.05,12846.23 ; 4570.91,12880.37 ccw(c4619.19,12880.37) v1@4585.05,12846.23 ; 4570.91,12880.37 ccw(c4619.19,12880.37) v1@4585.05,12846.23 ; 4774.7,13650.06 cw(c4816.57,13608.19) NRF24L01.4@4816.57,13667.4 ; 4774.7,13650.06 ccw(c4732.83,13691.93) NRF24L01.4@4792.05,13691.93 ; 4774.7,13650.06 ccw(c4732.83,13691.93) NRF24L01.4@4792.05,13691.93 ; 4774.7,13650.06 cw(c4816.57,13608.19) NRF24L01.4@4816.57,13667.4 ; 4774.7,13650.06 ccw(c4732.83,13691.93) NRF24L01.4@4792.05,13691.93 ; 4774.7,13650.06 cw(c4816.57,13608.19) NRF24L01.4@4816.57,13667.4 ; 4774.7,13650.06 ccw(c4732.83,13691.93) NRF24L01.4@4792.05,13691.93 ; 4774.7,13650.06 cw(c4816.57,13608.19) NRF24L01.4@4816.57,13667.4 ; 4774.7,13650.06 ccw(c4732.83,13691.93) NRF24L01.4@4792.05,13691.93 ; 4774.7,13650.06 cw(c4816.57,13608.19) NRF24L01.4@4816.57,13667.4 ; 4774.7,13650.06 ccw(c4732.83,13691.93) NRF24L01.4@4792.05,13691.93 ; 4774.7,13650.06 cw(c4816.57,13608.19) NRF24L01.4@4816.57,13667.4 ; 4786.06,13669.58 cw(c4823.19,13659.63) NRF24L01.4@4815.48,13697.29 ; 4786.06,13669.58 cw(c4823.19,13659.63) NRF24L01.4@4815.48,13697.29 ; 4786.06,13669.58 cw(c4823.19,13659.63) NRF24L01.4@4815.48,13697.29 ; 4786.06,13669.58 cw(c4823.19,13659.63) NRF24L01.4@4815.48,13697.29 ; 4786.06,13669.58 cw(c4823.19,13659.63) NRF24L01.4@4815.48,13697.29 ; 4786.06,13669.58 cw(c4823.19,13659.63) NRF24L01.4@4815.48,13697.29 ; 4786.06,13669.58 cw(c4823.19,13659.63) NRF24L01.4@4815.48,13697.29 ; 4786.06,13669.58 cw(c4823.19,13659.63) NRF24L01.4@4815.48,13697.29 ; 4786.06,13669.58 cw(c4823.19,13659.63) NRF24L01.4@4815.48,13697.29 ; 4786.06,13669.58 cw(c4823.19,13659.63) NRF24L01.4@4815.48,13697.29 ; 4786.06,13669.58 cw(c4823.19,13659.63) NRF24L01.4@4815.48,13697.29 ; 4786.06,13669.58 cw(c4823.19,13659.63) NRF24L01.4@4815.48,13697.29 ; 4786.06,13669.58 cw(c4823.19,13659.63) NRF24L01.4@4815.48,13697.29 ; 4786.06,13669.58 cw(c4823.19,13659.63) NRF24L01.4@4815.48,13697.29 ; 4786.06,13669.58 cw(c4823.19,13659.63) NRF24L01.4@4815.48,13697.29 ; 4791.77,13667.13 cw(c4816.57,13642.33) NRF24L01.4@4816.57,13677.4 ; 4791.77,13667.13 ccw(c4766.97,13691.93) NRF24L01.4@4802.05,13691.93 ; 4791.77,13667.13 ccw(c4766.97,13691.93) NRF24L01.4@4802.05,13691.93 ; 4791.77,13667.13 cw(c4816.57,13642.33) NRF24L01.4@4816.57,13677.4 ; 4791.77,13667.13 ccw(c4766.97,13691.93) NRF24L01.4@4802.05,13691.93 ; 4791.77,13667.13 cw(c4816.57,13642.33) NRF24L01.4@4816.57,13677.4 ; 4791.77,13667.13 ccw(c4766.97,13691.93) NRF24L01.4@4802.05,13691.93 ; 4791.77,13667.13 cw(c4816.57,13642.33) NRF24L01.4@4816.57,13677.4 ; 4791.77,13667.13 ccw(c4766.97,13691.93) NRF24L01.4@4802.05,13691.93 ; 4791.77,13667.13 cw(c4816.57,13642.33) NRF24L01.4@4816.57,13677.4 ; 4791.77,13667.13 ccw(c4766.97,13691.93) NRF24L01.4@4802.05,13691.93 ; 4791.77,13667.13 cw(c4816.57,13642.33) NRF24L01.4@4816.57,13677.4 ; 4794.23,13661.41 ccw(c4784.28,13698.54) NRF24L01.4@4821.94,13690.83 ; 4794.23,13661.41 ccw(c4784.28,13698.54) NRF24L01.4@4821.94,13690.83 ; 4794.23,13661.41 ccw(c4784.28,13698.54) NRF24L01.4@4821.94,13690.83 ; 4794.23,13661.41 ccw(c4784.28,13698.54) NRF24L01.4@4821.94,13690.83 ; 4794.23,13661.41 ccw(c4784.28,13698.54) NRF24L01.4@4821.94,13690.83 ; 4794.23,13661.41 ccw(c4784.28,13698.54) NRF24L01.4@4821.94,13690.83 ; 4794.23,13661.41 ccw(c4784.28,13698.54) NRF24L01.4@4821.94,13690.83 ; 4794.23,13661.41 ccw(c4784.28,13698.54) NRF24L01.4@4821.94,13690.83 ; 4794.23,13661.41 ccw(c4784.28,13698.54) NRF24L01.4@4821.94,13690.83 ; 4794.23,13661.41 ccw(c4784.28,13698.54) NRF24L01.4@4821.94,13690.83 ; 4794.23,13661.41 ccw(c4784.28,13698.54) NRF24L01.4@4821.94,13690.83 ; 4794.23,13661.41 ccw(c4784.28,13698.54) NRF24L01.4@4821.94,13690.83 ; 4794.23,13661.41 ccw(c4784.28,13698.54) NRF24L01.4@4821.94,13690.83 ; 4794.23,13661.41 ccw(c4784.28,13698.54) NRF24L01.4@4821.94,13690.83 ; 4794.23,13661.41 ccw(c4784.28,13698.54) NRF24L01.4@4821.94,13690.83
PA5: NRF24L01.5 U2.10 | length 8335.2
  Top Layer w10: NRF24L01.5@4916.57,13591.93 4965,13640.35 4965,13741.93 5027.6,13804.53 6094.53,13804.53 6440.98,13458.07 6440.98,11902.95 6094.53,11556.5 5070.91,11556.5 5024.45,11602.95 U2.10@5024.45,11934.45 ; NRF24L01.5@4911.21,13593.03 cw(c4948.87,13585.32) 4938.92,13622.44 ; NRF24L01.5@4911.21,13593.03 cw(c4948.87,13585.32) 4938.92,13622.44 ; NRF24L01.5@4911.21,13593.03 cw(c4948.87,13585.32) 4938.92,13622.44 ; NRF24L01.5@4911.21,13593.03 cw(c4948.87,13585.32) 4938.92,13622.44 ; NRF24L01.5@4911.21,13593.03 cw(c4948.87,13585.32) 4938.92,13622.44 ; NRF24L01.5@4911.21,13593.03 cw(c4948.87,13585.32) 4938.92,13622.44 ; NRF24L01.5@4911.21,13593.03 cw(c4948.87,13585.32) 4938.92,13622.44 ; NRF24L01.5@4911.21,13593.03 cw(c4948.87,13585.32) 4938.92,13622.44 ; NRF24L01.5@4911.21,13593.03 cw(c4948.87,13585.32) 4938.92,13622.44 ; NRF24L01.5@4911.21,13593.03 cw(c4948.87,13585.32) 4938.92,13622.44 ; NRF24L01.5@4911.21,13593.03 cw(c4948.87,13585.32) 4938.92,13622.44 ; NRF24L01.5@4911.21,13593.03 cw(c4948.87,13585.32) 4938.92,13622.44 ; NRF24L01.5@4911.21,13593.03 cw(c4948.87,13585.32) 4938.92,13622.44 ; NRF24L01.5@4911.21,13593.03 cw(c4948.87,13585.32) 4938.92,13622.44 ; NRF24L01.5@4911.21,13593.03 cw(c4948.87,13585.32) 4938.92,13622.44 ; NRF24L01.5@4916.57,13606.46 ccw(c4916.57,13641.53) 4941.37,13616.73 ; NRF24L01.5@4916.57,13606.46 ccw(c4916.57,13641.53) 4941.37,13616.73 ; NRF24L01.5@4916.57,13606.46 ccw(c4916.57,13641.53) 4941.37,13616.73 ; NRF24L01.5@4916.57,13606.46 ccw(c4916.57,13641.53) 4941.37,13616.73 ; NRF24L01.5@4916.57,13606.46 ccw(c4916.57,13641.53) 4941.37,13616.73 ; NRF24L01.5@4916.57,13606.46 ccw(c4916.57,13641.53) 4941.37,13616.73 ; NRF24L01.5@4916.57,13616.46 ccw(c4916.57,13675.67) 4958.45,13633.8 ; NRF24L01.5@4916.57,13616.46 ccw(c4916.57,13675.67) 4958.45,13633.8 ; NRF24L01.5@4916.57,13616.46 ccw(c4916.57,13675.67) 4958.45,13633.8 ; NRF24L01.5@4916.57,13616.46 ccw(c4916.57,13675.67) 4958.45,13633.8 ; NRF24L01.5@4916.57,13616.46 ccw(c4916.57,13675.67) 4958.45,13633.8 ; NRF24L01.5@4916.57,13616.46 ccw(c4916.57,13675.67) 4958.45,13633.8 ; NRF24L01.5@4917.67,13586.57 ccw(c4909.96,13624.23) 4947.09,13614.28 ; NRF24L01.5@4917.67,13586.57 ccw(c4909.96,13624.23) 4947.09,13614.28 ; NRF24L01.5@4917.67,13586.57 ccw(c4909.96,13624.23) 4947.09,13614.28 ; NRF24L01.5@4917.67,13586.57 ccw(c4909.96,13624.23) 4947.09,13614.28 ; NRF24L01.5@4917.67,13586.57 ccw(c4909.96,13624.23) 4947.09,13614.28 ; NRF24L01.5@4917.67,13586.57 ccw(c4909.96,13624.23) 4947.09,13614.28 ; NRF24L01.5@4917.67,13586.57 ccw(c4909.96,13624.23) 4947.09,13614.28 ; NRF24L01.5@4917.67,13586.57 ccw(c4909.96,13624.23) 4947.09,13614.28 ; NRF24L01.5@4917.67,13586.57 ccw(c4909.96,13624.23) 4947.09,13614.28 ; NRF24L01.5@4917.67,13586.57 ccw(c4909.96,13624.23) 4947.09,13614.28 ; NRF24L01.5@4917.67,13586.57 ccw(c4909.96,13624.23) 4947.09,13614.28 ; NRF24L01.5@4917.67,13586.57 ccw(c4909.96,13624.23) 4947.09,13614.28 ; NRF24L01.5@4917.67,13586.57 ccw(c4909.96,13624.23) 4947.09,13614.28 ; NRF24L01.5@4917.67,13586.57 ccw(c4909.96,13624.23) 4947.09,13614.28 ; NRF24L01.5@4917.67,13586.57 ccw(c4909.96,13624.23) 4947.09,13614.28 ; NRF24L01.5@4931.1,13591.93 cw(c4966.17,13591.93) 4941.37,13616.73 ; NRF24L01.5@4931.1,13591.93 cw(c4966.17,13591.93) 4941.37,13616.73 ; NRF24L01.5@4931.1,13591.93 cw(c4966.17,13591.93) 4941.37,13616.73 ; NRF24L01.5@4931.1,13591.93 cw(c4966.17,13591.93) 4941.37,13616.73 ; NRF24L01.5@4931.1,13591.93 cw(c4966.17,13591.93) 4941.37,13616.73 ; NRF24L01.5@4931.1,13591.93 cw(c4966.17,13591.93) 4941.37,13616.73 ; NRF24L01.5@4941.1,13591.93 cw(c5000.32,13591.93) 4958.45,13633.8 ; NRF24L01.5@4941.1,13591.93 cw(c5000.32,13591.93) 4958.45,13633.8 ; NRF24L01.5@4941.1,13591.93 cw(c5000.32,13591.93) 4958.45,13633.8 ; NRF24L01.5@4941.1,13591.93 cw(c5000.32,13591.93) 4958.45,13633.8 ; NRF24L01.5@4941.1,13591.93 cw(c5000.32,13591.93) 4958.45,13633.8 ; NRF24L01.5@4941.1,13591.93 cw(c5000.32,13591.93) 4958.45,13633.8 ; U2.10@5007.11,11917.11 cw(c4965.23,11875.23) 5024.45,11875.23 ; U2.10@5007.11,11917.11 cw(c4965.23,11875.23) 5024.45,11875.23 ; U2.10@5007.11,11917.11 cw(c4965.23,11875.23) 5024.45,11875.23 ; U2.10@5007.11,11917.11 cw(c4965.23,11875.23) 5024.45,11875.23 ; U2.10@5007.11,11917.11 cw(c4965.23,11875.23) 5024.45,11875.23 ; U2.10@5007.11,11917.11 cw(c4965.23,11875.23) 5024.45,11875.23 ; U2.10@5014.18,11924.18 cw(c4989.38,11899.38) 5024.45,11899.38 ; U2.10@5014.18,11924.18 cw(c4989.38,11899.38) 5024.45,11899.38 ; U2.10@5014.18,11924.18 cw(c4989.38,11899.38) 5024.45,11899.38 ; U2.10@5014.18,11924.18 cw(c4989.38,11899.38) 5024.45,11899.38 ; U2.10@5014.18,11924.18 cw(c4989.38,11899.38) 5024.45,11899.38 ; U2.10@5014.18,11924.18 cw(c4989.38,11899.38) 5024.45,11899.38 ; 5024.45,11875.23 cw(c5083.66,11875.23) U2.10@5041.79,11917.11 ; 5024.45,11875.23 cw(c5083.66,11875.23) U2.10@5041.79,11917.11 ; 5024.45,11875.23 cw(c5083.66,11875.23) U2.10@5041.79,11917.11 ; 5024.45,11875.23 cw(c5083.66,11875.23) U2.10@5041.79,11917.11 ; 5024.45,11875.23 cw(c5083.66,11875.23) U2.10@5041.79,11917.11 ; 5024.45,11875.23 cw(c5083.66,11875.23) U2.10@5041.79,11917.11 ; 5024.45,11899.38 cw(c5059.52,11899.38) U2.10@5034.72,11924.18 ; 5024.45,11899.38 cw(c5059.52,11899.38) U2.10@5034.72,11924.18 ; 5024.45,11899.38 cw(c5059.52,11899.38) U2.10@5034.72,11924.18 ; 5024.45,11899.38 cw(c5059.52,11899.38) U2.10@5034.72,11924.18 ; 5024.45,11899.38 cw(c5059.52,11899.38) U2.10@5034.72,11924.18 ; 5024.45,11899.38 cw(c5059.52,11899.38) U2.10@5034.72,11924.18
PA6: NRF24L01.7 U2.11 | length 7483.6
  Top Layer w10: NRF24L01.7@5016.57,13591.93 5126.81,13702.17 5996.1,13702.17 6315,13383.27 6315,12009.25 5948.86,11643.11 5216.57,11643.11 5124.45,11735.24 U2.11@5124.45,11934.45 ; NRF24L01.7@5011.21,13593.03 cw(c5048.87,13585.32) 5038.92,13622.44 ; NRF24L01.7@5011.21,13593.03 cw(c5048.87,13585.32) 5038.92,13622.44 ; NRF24L01.7@5011.21,13593.03 cw(c5048.87,13585.32) 5038.92,13622.44 ; NRF24L01.7@5011.21,13593.03 cw(c5048.87,13585.32) 5038.92,13622.44 ; NRF24L01.7@5011.21,13593.03 cw(c5048.87,13585.32) 5038.92,13622.44 ; NRF24L01.7@5011.21,13593.03 cw(c5048.87,13585.32) 5038.92,13622.44 ; NRF24L01.7@5011.21,13593.03 cw(c5048.87,13585.32) 5038.92,13622.44 ; NRF24L01.7@5011.21,13593.03 cw(c5048.87,13585.32) 5038.92,13622.44 ; NRF24L01.7@5011.21,13593.03 cw(c5048.87,13585.32) 5038.92,13622.44 ; NRF24L01.7@5011.21,13593.03 cw(c5048.87,13585.32) 5038.92,13622.44 ; NRF24L01.7@5011.21,13593.03 cw(c5048.87,13585.32) 5038.92,13622.44 ; NRF24L01.7@5011.21,13593.03 cw(c5048.87,13585.32) 5038.92,13622.44 ; NRF24L01.7@5011.21,13593.03 cw(c5048.87,13585.32) 5038.92,13622.44 ; NRF24L01.7@5011.21,13593.03 cw(c5048.87,13585.32) 5038.92,13622.44 ; NRF24L01.7@5011.21,13593.03 cw(c5048.87,13585.32) 5038.92,13622.44 ; NRF24L01.7@5016.57,13606.46 ccw(c5016.57,13641.53) 5041.37,13616.73 ; NRF24L01.7@5016.57,13606.46 ccw(c5016.57,13641.53) 5041.37,13616.73 ; NRF24L01.7@5016.57,13606.46 ccw(c5016.57,13641.53) 5041.37,13616.73 ; NRF24L01.7@5016.57,13606.46 ccw(c5016.57,13641.53) 5041.37,13616.73 ; NRF24L01.7@5016.57,13606.46 ccw(c5016.57,13641.53) 5041.37,13616.73 ; NRF24L01.7@5016.57,13606.46 ccw(c5016.57,13641.53) 5041.37,13616.73 ; NRF24L01.7@5016.57,13616.46 ccw(c5016.57,13675.67) 5058.45,13633.8 ; NRF24L01.7@5016.57,13616.46 ccw(c5016.57,13675.67) 5058.45,13633.8 ; NRF24L01.7@5016.57,13616.46 ccw(c5016.57,13675.67) 5058.45,13633.8 ; NRF24L01.7@5016.57,13616.46 ccw(c5016.57,13675.67) 5058.45,13633.8 ; NRF24L01.7@5016.57,13616.46 ccw(c5016.57,13675.67) 5058.45,13633.8 ; NRF24L01.7@5016.57,13616.46 ccw(c5016.57,13675.67) 5058.45,13633.8 ; NRF24L01.7@5017.67,13586.57 ccw(c5009.96,13624.23) 5047.09,13614.28 ; NRF24L01.7@5017.67,13586.57 ccw(c5009.96,13624.23) 5047.09,13614.28 ; NRF24L01.7@5017.67,13586.57 ccw(c5009.96,13624.23) 5047.09,13614.28 ; NRF24L01.7@5017.67,13586.57 ccw(c5009.96,13624.23) 5047.09,13614.28 ; NRF24L01.7@5017.67,13586.57 ccw(c5009.96,13624.23) 5047.09,13614.28 ; NRF24L01.7@5017.67,13586.57 ccw(c5009.96,13624.23) 5047.09,13614.28 ; NRF24L01.7@5017.67,13586.57 ccw(c5009.96,13624.23) 5047.09,13614.28 ; NRF24L01.7@5017.67,13586.57 ccw(c5009.96,13624.23) 5047.09,13614.28 ; NRF24L01.7@5017.67,13586.57 ccw(c5009.96,13624.23) 5047.09,13614.28 ; NRF24L01.7@5017.67,13586.57 ccw(c5009.96,13624.23) 5047.09,13614.28 ; NRF24L01.7@5017.67,13586.57 ccw(c5009.96,13624.23) 5047.09,13614.28 ; NRF24L01.7@5017.67,13586.57 ccw(c5009.96,13624.23) 5047.09,13614.28 ; NRF24L01.7@5017.67,13586.57 ccw(c5009.96,13624.23) 5047.09,13614.28 ; NRF24L01.7@5017.67,13586.57 ccw(c5009.96,13624.23) 5047.09,13614.28 ; NRF24L01.7@5017.67,13586.57 ccw(c5009.96,13624.23) 5047.09,13614.28 ; NRF24L01.7@5031.1,13591.93 cw(c5066.17,13591.93) 5041.37,13616.73 ; NRF24L01.7@5031.1,13591.93 cw(c5066.17,13591.93) 5041.37,13616.73 ; NRF24L01.7@5031.1,13591.93 cw(c5066.17,13591.93) 5041.37,13616.73 ; NRF24L01.7@5031.1,13591.93 cw(c5066.17,13591.93) 5041.37,13616.73 ; NRF24L01.7@5031.1,13591.93 cw(c5066.17,13591.93) 5041.37,13616.73 ; NRF24L01.7@5031.1,13591.93 cw(c5066.17,13591.93) 5041.37,13616.73 ; NRF24L01.7@5041.1,13591.93 cw(c5100.32,13591.93) 5058.45,13633.8 ; NRF24L01.7@5041.1,13591.93 cw(c5100.32,13591.93) 5058.45,13633.8 ; NRF24L01.7@5041.1,13591.93 cw(c5100.32,13591.93) 5058.45,13633.8 ; NRF24L01.7@5041.1,13591.93 cw(c5100.32,13591.93) 5058.45,13633.8 ; NRF24L01.7@5041.1,13591.93 cw(c5100.32,13591.93) 5058.45,13633.8 ; NRF24L01.7@5041.1,13591.93 cw(c5100.32,13591.93) 5058.45,13633.8 ; U2.11@5107.11,11917.11 cw(c5065.23,11875.23) 5124.45,11875.23 ; U2.11@5107.11,11917.11 cw(c5065.23,11875.23) 5124.45,11875.23 ; U2.11@5107.11,11917.11 cw(c5065.23,11875.23) 5124.45,11875.23 ; U2.11@5107.11,11917.11 cw(c5065.23,11875.23) 5124.45,11875.23 ; U2.11@5107.11,11917.11 cw(c5065.23,11875.23) 5124.45,11875.23 ; U2.11@5107.11,11917.11 cw(c5065.23,11875.23) 5124.45,11875.23 ; U2.11@5114.18,11924.18 cw(c5089.38,11899.38) 5124.45,11899.38 ; U2.11@5114.18,11924.18 cw(c5089.38,11899.38) 5124.45,11899.38 ; U2.11@5114.18,11924.18 cw(c5089.38,11899.38) 5124.45,11899.38 ; U2.11@5114.18,11924.18 cw(c5089.38,11899.38) 5124.45,11899.38 ; U2.11@5114.18,11924.18 cw(c5089.38,11899.38) 5124.45,11899.38 ; U2.11@5114.18,11924.18 cw(c5089.38,11899.38) 5124.45,11899.38 ; 5124.45,11875.23 cw(c5183.66,11875.23) U2.11@5141.79,11917.11 ; 5124.45,11875.23 cw(c5183.66,11875.23) U2.11@5141.79,11917.11 ; 5124.45,11875.23 cw(c5183.66,11875.23) U2.11@5141.79,11917.11 ; 5124.45,11875.23 cw(c5183.66,11875.23) U2.11@5141.79,11917.11 ; 5124.45,11875.23 cw(c5183.66,11875.23) U2.11@5141.79,11917.11 ; 5124.45,11875.23 cw(c5183.66,11875.23) U2.11@5141.79,11917.11 ; 5124.45,11899.38 cw(c5159.52,11899.38) U2.11@5134.72,11924.18 ; 5124.45,11899.38 cw(c5159.52,11899.38) U2.11@5134.72,11924.18 ; 5124.45,11899.38 cw(c5159.52,11899.38) U2.11@5134.72,11924.18 ; 5124.45,11899.38 cw(c5159.52,11899.38) U2.11@5134.72,11924.18 ; 5124.45,11899.38 cw(c5159.52,11899.38) U2.11@5134.72,11924.18 ; 5124.45,11899.38 cw(c5159.52,11899.38) U2.11@5134.72,11924.18

## Text inside footprints (layer, text, board x,y; h text height)
NRF24L01: Top Overlay "8" at 5086.65,13670.67 h50; Top Overlay "7" at 5094.53,13572.24 h50; Top Overlay "1" at 4622.09,13568.31 h50; Top Overlay "2" at 4610.28,13670.67 h50